# EAGLE board NusbioMCU (EAGLE 7.4.0)
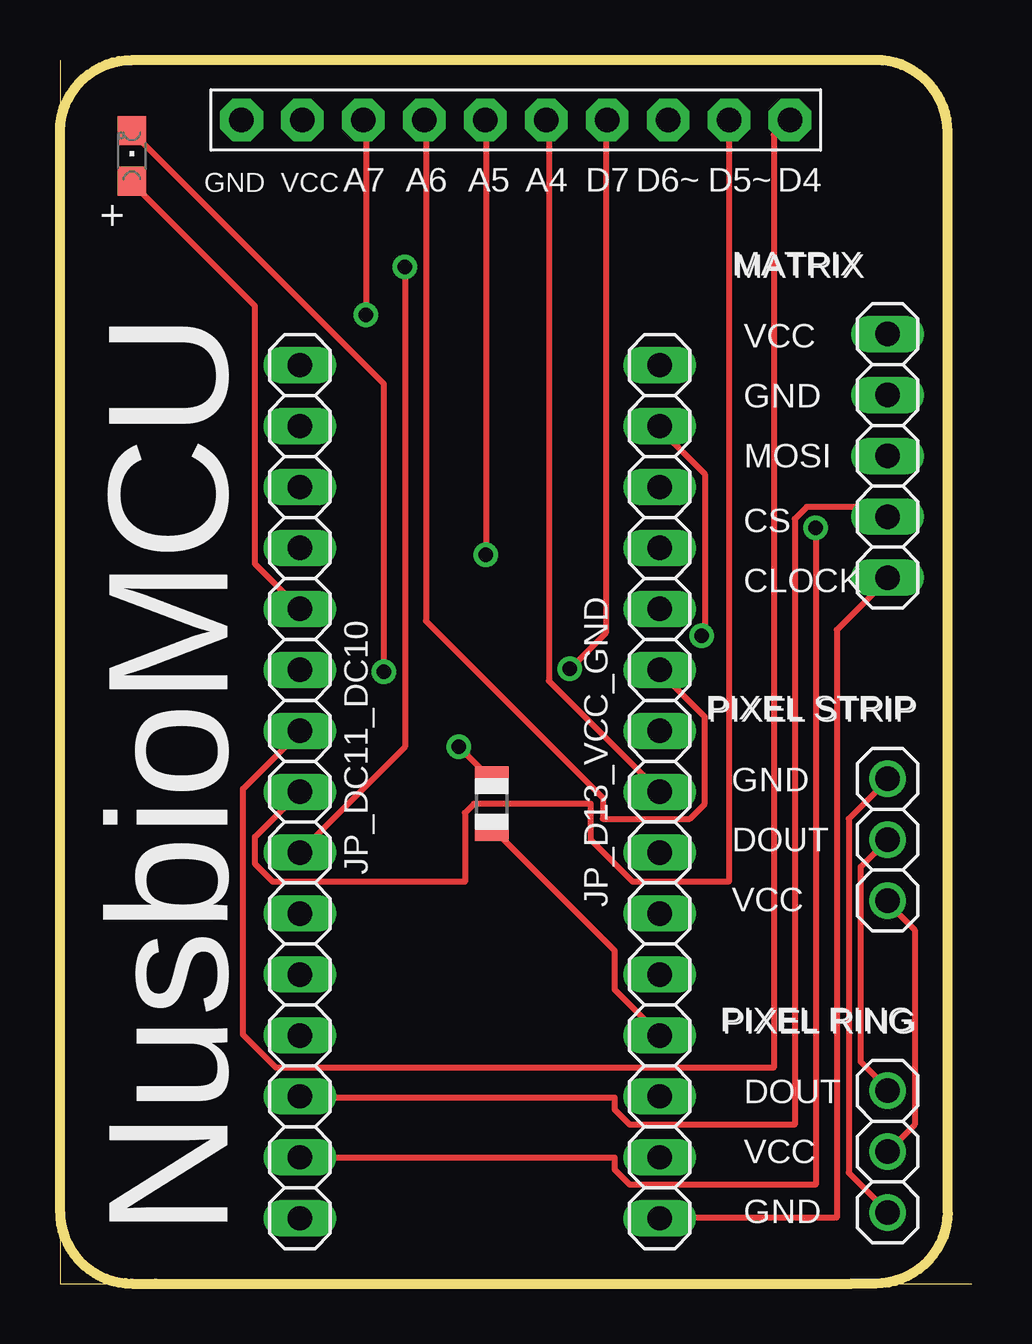
[diagram p0: board, top side]
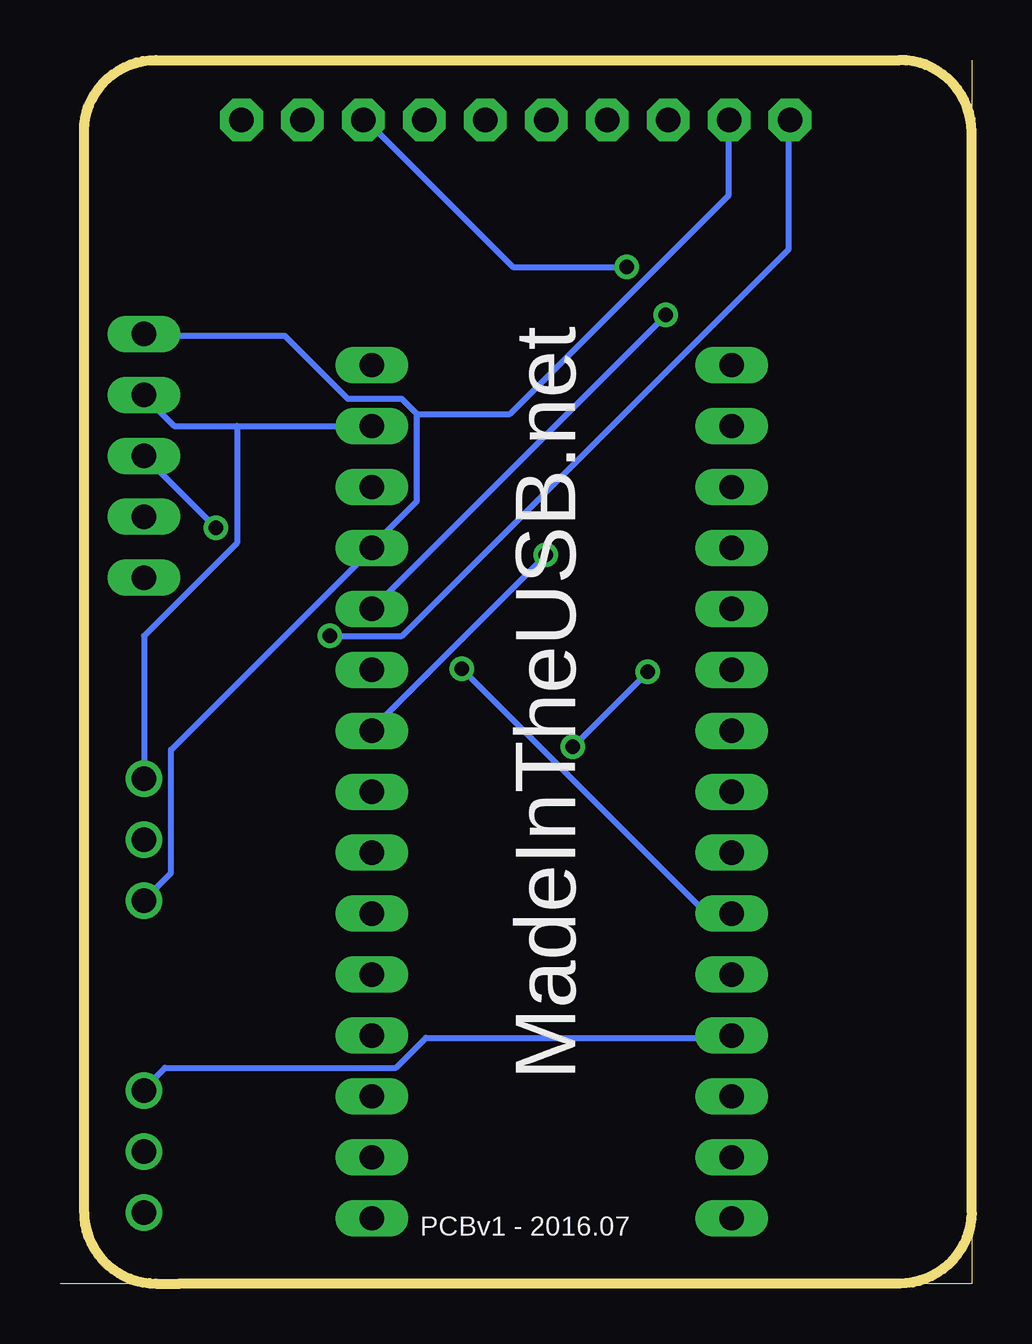
[diagram p1: board, bottom side, seen from below]

Size 38 x 51 mm. Coordinates in mm from the lower left corner, seen from the top.
Outline: 4,0 0,0 0,3
Outline: 24,0 33,0
Outline: 33,0 38,0
Outline: 0,51 0,48
Outline: 0,48 0,42
Outline: 0,3 arc90 3,0 4,0
Outline: 4,0 33,0
Outline: 33,0 34,0 arc90 37,3 37,48 arc90 34,51 3,51 arc90 0,48
Outline: 0,3 0,48
Copper layers (1*16): Top 0.035mm / dielectric 1.5mm / Bottom 0.035mm
Design rules "default": minimum track width 10mil, minimum drill 24mil, track to track 8mil, track to pad 8mil, pad to pad 8mil, via to via 8mil, smd to smd 8mil, copper to edge 40mil, drill to drill 8mil, minimum pad ring 10mil, minimum via ring 8mil, stop-mask expansion 4mil, vias tented up to drill 0mil, thermal gap 10mil

## Footprints (pad centres in the part's own frame; a part is rotated, then mirrored left to right if it is on the bottom)
1X10-BIG = drill 1.016 pad 1.778 octagon: 1 -11.43,0; 2 -8.89,0; 3 -6.35,0; 4 -3.81,0; 5 -1.27,0; 6 1.27,0; 7 3.81,0; 8 6.35,0; 9 8.89,0; 10 11.43,0
1X03 = drill 1.016: 1 -2.54,0; 2 0,0; 3 2.54,0
1X15 = drill 1.016 long: 1 -17.78,0; 2 -15.24,0; 3 -12.7,0; 4 -10.16,0; 5 -7.62,0; 6 -5.08,0; 7 -2.54,0; 8 0,0; 9 2.54,0; 10 5.08,0; 11 7.62,0; 12 10.16,0; 13 12.7,0; 14 15.24,0; 15 17.78,0
CHIPLED_0805 = smd 1.2 x 1.2: A 0,-1.05; C 0,1.05
1X05 = drill 1.016 long: 1 -5.08,0; 2 -2.54,0; 3 0,0; 4 2.54,0; 5 5.08,0
R0805 = smd 1.1 x 1.4: 1 -1,0; 2 1,0

## Placement (x,y rotation side)
DX_AX_PINS  PINHD-1X10  [1X10-BIG]  19,48.5 0 top
JP1  [1X03]  34.5,18.5 270 top
JP2  [1X03]  34.5,5.5 90 top
JP_D13_VCC_GND  [1X15]  25,20.5 270 top
JP_DC11_DC10  [1X15]  10,20.5 270 top
LED1  [CHIPLED_0805]  3,47 0 top
MATRIX  [1X05]  34.5,34.5 270 top
R1  [R0805]  18,20 90 top

## Library data of the parts
DX_AX_PINS JP1 JP2 JP_D13_VCC_GND JP_DC11_DC10 LED1 R1 = adafruit
MATRIX = pinhead

## Nets
A0_SECURITY: JP_D13_VCC_GND.12 R1.1
A1_LIGHT: JP_D13_VCC_GND.11
A2_MOTION: JP_D13_VCC_GND.10
A3: JP_D13_VCC_GND.9
A4: DX_AX_PINS.6 JP_D13_VCC_GND.8
A5: DX_AX_PINS.5 JP_D13_VCC_GND.7
A6: DX_AX_PINS.4 JP_D13_VCC_GND.6
A7: DX_AX_PINS.3 JP_D13_VCC_GND.5
D2_SECURITY: JP_DC11_DC10.5 LED1.A
D3_PWM: JP_DC11_DC10.6
D4: DX_AX_PINS.10 JP_DC11_DC10.7
D5_PWM: DX_AX_PINS.9 JP_DC11_DC10.8
D6_PWM: DX_AX_PINS.8 JP_DC11_DC10.9
D7: DX_AX_PINS.7 JP_DC11_DC10.10
D8: JP_DC11_DC10.11
D9_PWM: JP1.2 JP2.3 JP_DC11_DC10.12
D13_SCK: JP_D13_VCC_GND.15 MATRIX.5
DC10_CS: JP_DC11_DC10.13 MATRIX.4
DC11_MOSI: JP_DC11_DC10.14 MATRIX.3
DC12_MISO: JP_DC11_DC10.15
GND: DX_AX_PINS.1 JP1.1 JP2.1 JP_D13_VCC_GND.2 MATRIX.2
N$1: LED1.C R1.2
VCC: DX_AX_PINS.2 JP1.3 JP2.2 JP_D13_VCC_GND.4 MATRIX.1

## Tracks (layer width: path | path; a pad name or v marks a point on that pad's centre or on a via)
A0_SECURITY
  Top 0.254: R1.1 23.12,13.88 23.12,12.25 25,10.38 JP_D13_VCC_GND.12
A4
  Top 0.254: JP_D13_VCC_GND.8 20.38,25.12 20.38,48.5 DX_AX_PINS.6
A5  (via drill 0.61)
  Top 0.254: v17.75,30.38 17.75,48.5 DX_AX_PINS.5
  Bottom 0.254: v17.75,30.38 25,23.12 JP_D13_VCC_GND.7
A6
  Top 0.254: JP_D13_VCC_GND.6 25,25.5 26.88,23.62 26.88,20 26.25,19.38 22.62,19.38 22.62,20.25 15.25,27.62 15.25,48.5 DX_AX_PINS.4
A7  (via drill 0.61)
  Top 0.254: v12.75,40.38 12.75,48.5 DX_AX_PINS.3
  Bottom 0.254: v12.75,40.38 JP_D13_VCC_GND.5
D2_SECURITY
  Top 0.254: LED1.A 3,45.88 8.12,40.75 8.12,30 JP_DC11_DC10.5
D4
  Top 0.254: JP_DC11_DC10.7 10,23 7.62,20.62 7.62,10.38 9,9 29.75,9 29.75,47.88 30.38,48.5 DX_AX_PINS.10
D5_PWM
  Top 0.254: JP_DC11_DC10.8 8.12,18.62 8.12,17.5 8.88,16.75 16.88,16.75 16.88,19.62 17.25,20 22.12,20 22.12,18.5 23.88,16.75 27.88,16.75 27.88,48.5 DX_AX_PINS.9
D6_PWM  (via drill 0.61)
  Top 0.254: v14.38,42.38 14.38,22.38 10,18 JP_DC11_DC10.9
  Bottom 0.254: v14.38,42.38 19.12,42.38 25.25,48.5 DX_AX_PINS.8
D7  (via drill 0.61)
  Top 0.254: v21.25,25.62 22.75,27.12 22.75,48.5 DX_AX_PINS.7
  Bottom 0.254: v21.25,25.62 11.12,15.5 10,15.5 JP_DC11_DC10.10
D9_PWM
  Top 0.254: JP1.2 33.38,17.38 33.38,9.25 34.5,8.12 JP2.3
  Bottom 0.254: JP_DC11_DC10.12 10,10.25 22.75,10.25 24,9 33.62,9 34.5,8.12 JP2.3
D13_SCK
  Top 0.254: JP_D13_VCC_GND.15 25,2.75 32.38,2.75 32.38,27.25 34.5,29.38 MATRIX.5
DC10_CS
  Top 0.254: MATRIX.4 34.5,32.38 31.12,32.38 30.62,31.88 30.62,6.62 23.75,6.62 23.12,7.25 23.12,7.75 10,7.75 JP_DC11_DC10.13
DC11_MOSI  (via drill 0.61)
  Top 0.254: v31.5,31.5 31.5,4.12 23.75,4.12 23.12,4.75 23.12,5.25 JP_DC11_DC10.14
  Bottom 0.254: MATRIX.3 v31.5,31.5
GND  (via drill 0.61)
  Top 0.254: JP2.1 34.5,3 32.88,4.62 32.88,19.38 34.5,21 JP1.1 | v26.75,27 26.88,27.12 26.88,33.75 25,35.62 JP_D13_VCC_GND.2
  Bottom 0.254: 30.62,35.75 33.25,35.75 34.5,37 MATRIX.2 | 30.62,35.75 JP_D13_VCC_GND.2 | v26.75,27 23.75,27 7.62,43.12 7.62,48.5 DX_AX_PINS.1 | JP1.1 34.5,27 30.62,30.88 30.62,35.75
N$1  (via drill 0.61)
  Top 0.254: v13.5,25.5 13.5,37.5 3,48 LED1.C | R1.2 v16.62,22.38
  Bottom 0.254: v16.62,22.38 v13.5,25.5
VCC
  Top 0.254: JP2.2 35.62,6.62 35.62,14.75 34.5,15.88 JP1.3
  Bottom 0.254: JP1.3 34.5,16 33.38,17.12 33.38,22.25 25,30.62 JP_D13_VCC_GND.4 25,30.75 23.12,32.62 23.12,36.25 | 23.12,36.25 23.75,36.88 26,36.88 28.62,39.5 34.5,39.5 MATRIX.1 | 23.12,36.25 19.25,36.25 10.12,45.38 10.12,48.5 DX_AX_PINS.2

## Text on the board
tNames: GND | VCC | A7 | A6 | A5 | A4 | D7 | D6~ | D5~ | D4 | + | MATRIX | MATRIX | VCC | GND | MOSI | CS | CLOCK | PIXEL STRIP | PIXEL STRIP | GND | DOUT | VCC | PIXEL RING | PIXEL RING | DOUT | VCC | NusbioMCU | GND
bNames: MadeInTheUSB.net | PCBv1 - 2016.07